# Altium PCB SmartHome.PcbDoc
Units mm, origin at the board's own origin, x right, y up, seen from the top; angles counter-clockwise.
Board outline 69.34 x 60.83 mm, 2 copper layers (Top Layer, Bottom Layer); 77 components, 68 nets, 304 pads, 21 vias.
Unrouted connection lines stored in the file: 49.
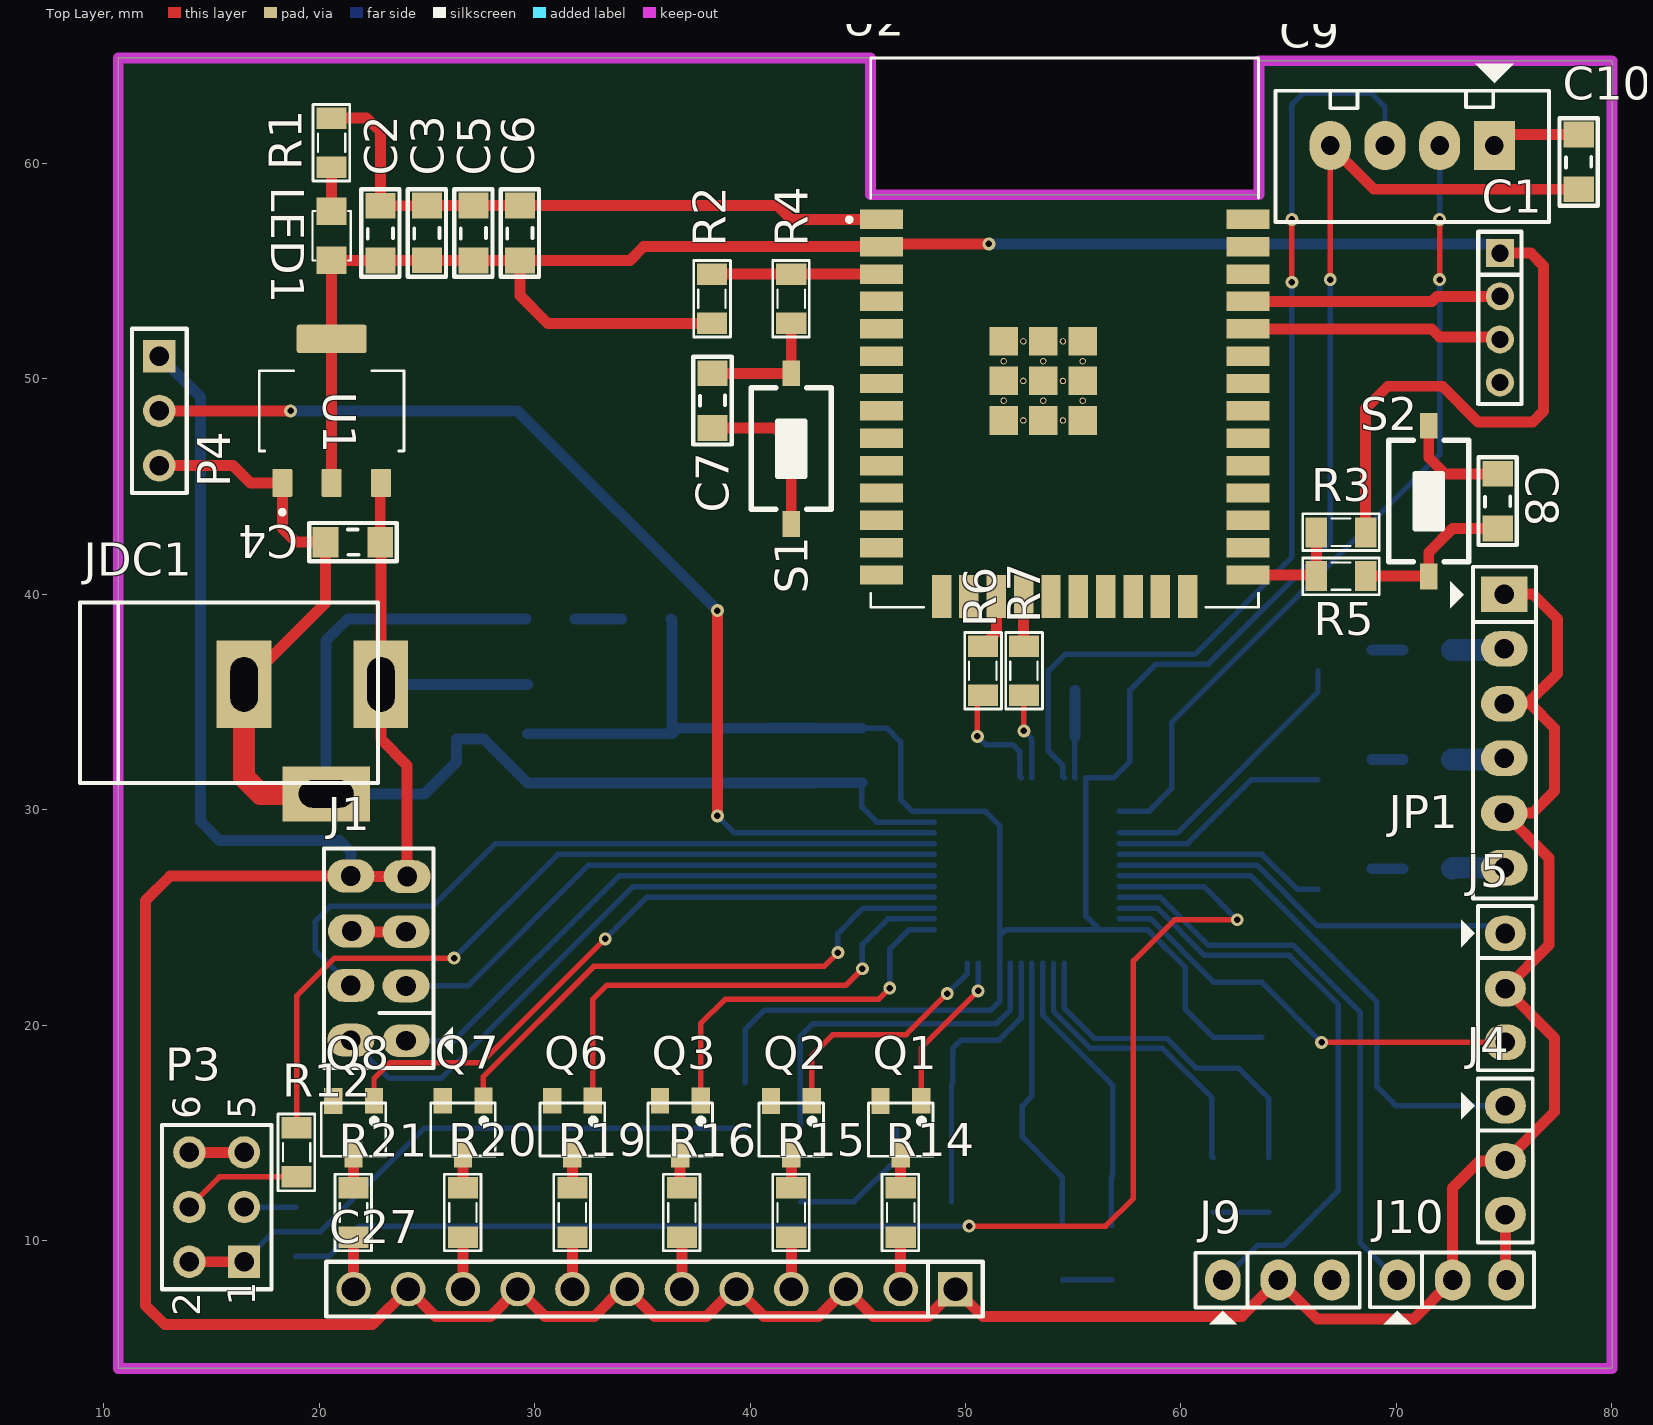
[diagram p0: Top Layer view]
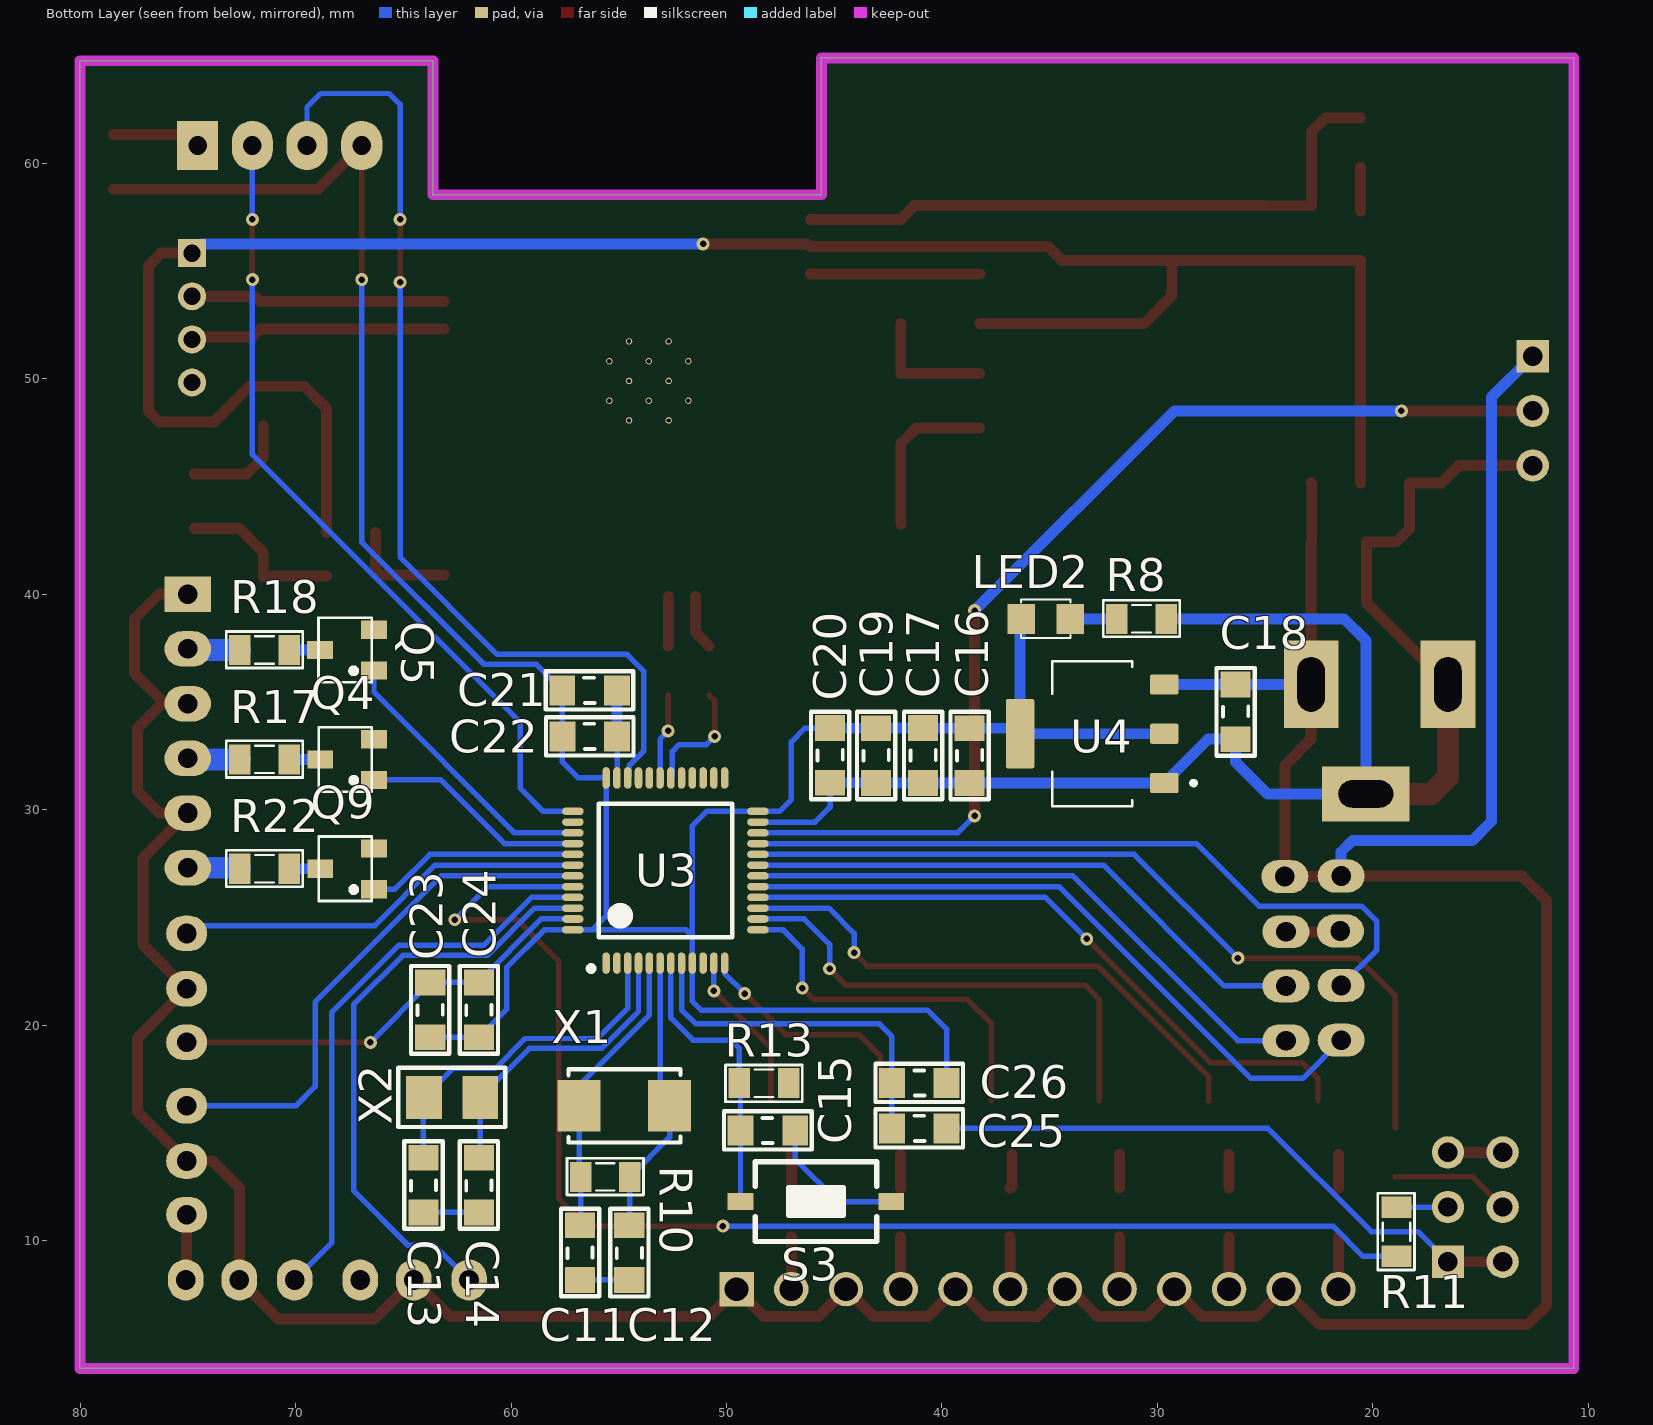
[diagram p1: Bottom Layer view, seen from below]
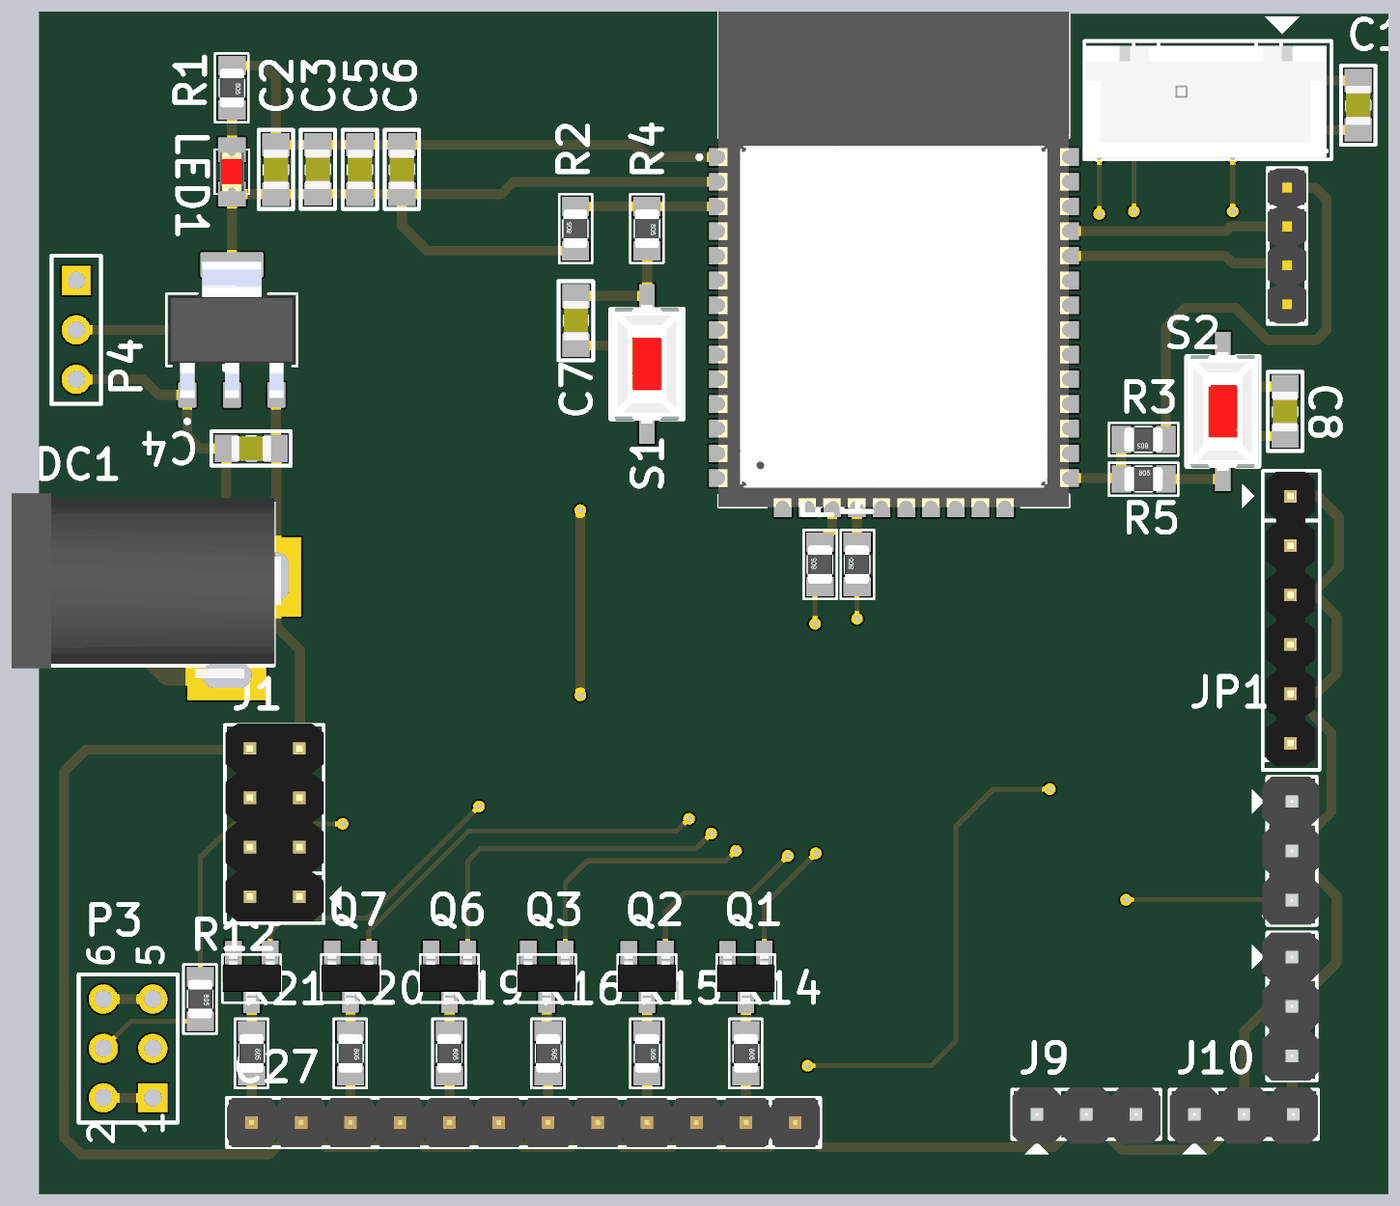
[diagram p2: 3D render of the assembled board from above, using the file's embedded part models]
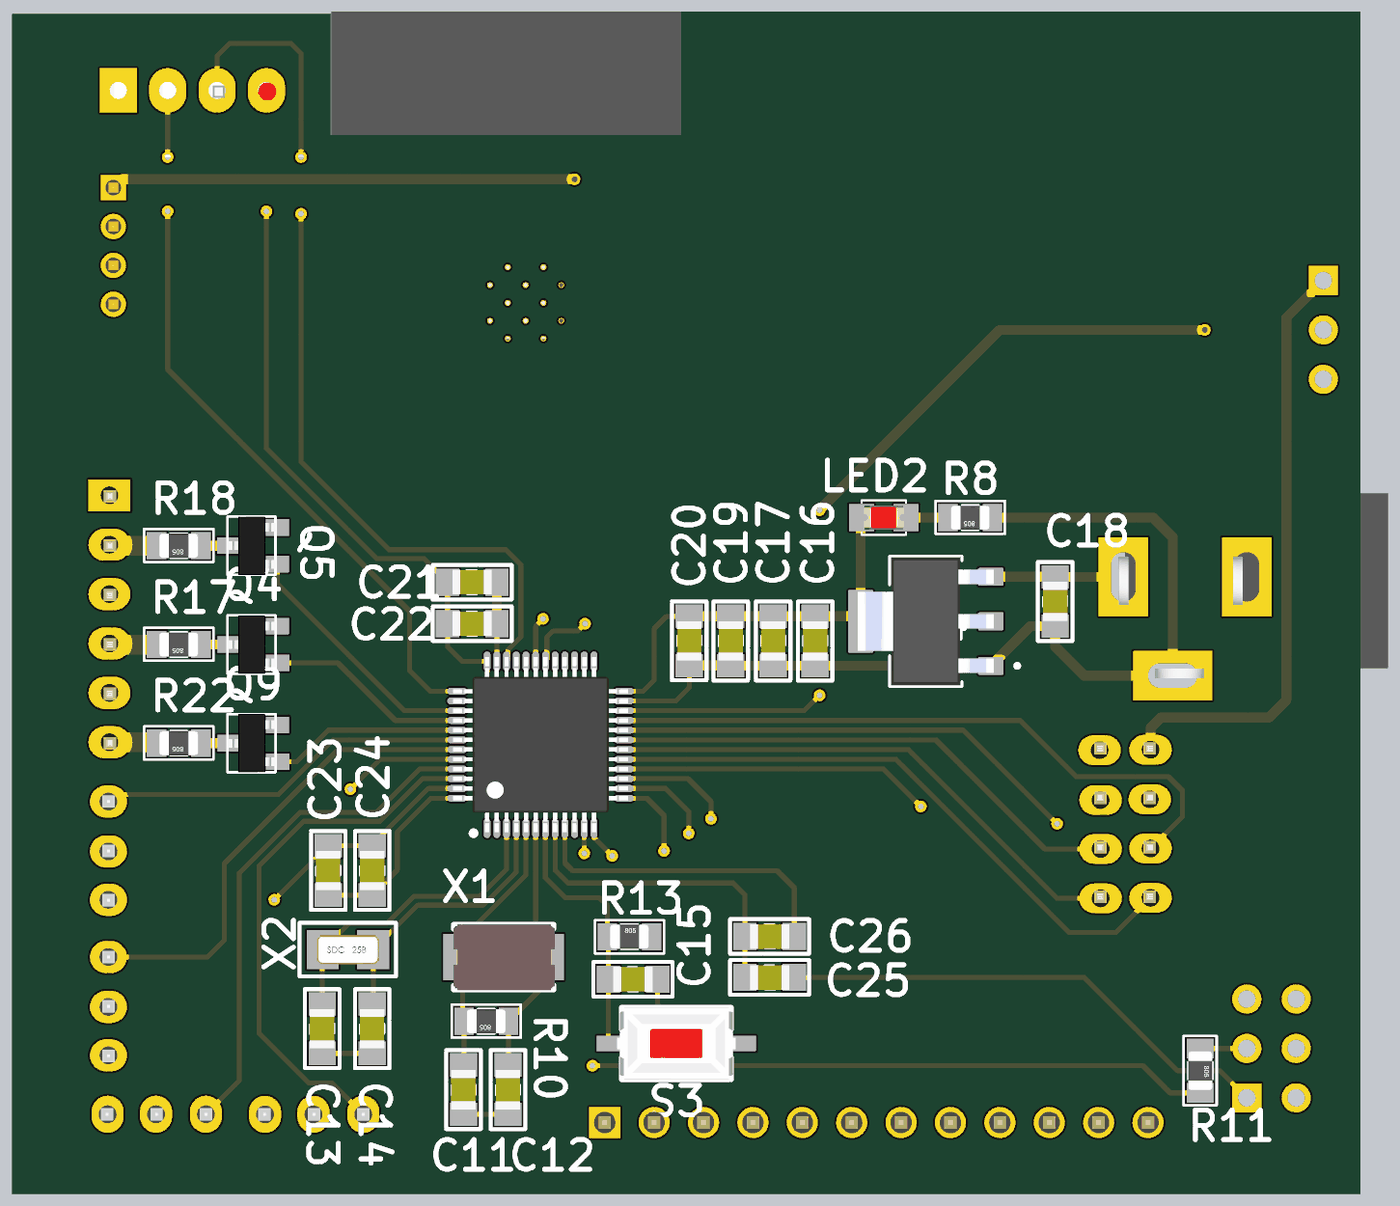
[diagram p3: 3D render of the assembled board from below, using the file's embedded part models]

## Layer stack, top to bottom
Top Solder: solder mask 0.0102, Solder Resist, Dk 3.5
Top Layer: signal copper 0.0356
Dielectric 1: dielectric 0.32, FR-4, Dk 4.8
Bottom Layer: signal copper 0.0356
Bottom Solder: solder mask 0.0102, Solder Resist, Dk 3.5

## Board outline
10.668,4.064 10.668,64.897 45.593,64.897 45.593,58.547 63.627,58.547 63.627,64.77 80.01,64.77 80.01,4.064

## Design rules (kind name [scope] priority, off if disabled: settings)
Clearance Clearance_2 [InComponent('J1')] p1: gap=0.127 ignorepadtopadclearanceinfootprint=FALSE
Clearance [InComponent('U3')] p2: gap=0.127 ignorepadtopadclearanceinfootprint=FALSE
Clearance Clearance_1 [All] p3: gap=0.203 ignorepadtopadclearanceinfootprint=FALSE
PolygonConnect [InNet('GND')] p1: connectstyle=Direct reliefconductorwidth=0.254 reliefentries=4 polygonreliefangle="90 Angle" airgapwidth=0.254
RoutingVias [All] p1: holewidth=0.3 width=0.6 viastyle="Through Hole" minholewidth=0.3 minwidth=0.6 maxholewidth=1 maxwidth=2
SolderMaskExpansion [All] p1: expansion=0.102
Width [All] p1: maxlimit=1.016 minlimit=0.254 preferedwidth=0.508
30 further rules are at their usual default settings.

## Classes and differential pairs
component class STM32: C9 C10 C11 C12 C13 C14 C15 C16 C17 C18 C19 C20 C21 C22 C23 C24 C25 C26 J1 J4 J5 J9 J10 LED2 P3 P4 R8 R10 R11 R12 R13 S3 U3 U4 X1 X2
component class LED_CONTROL: C27 JP1 Q1 Q2 Q3 Q4 Q5 Q6 Q7 Q8 Q9 R14 R15 R16 R17 R18 R19 R20 R21 R22
component class ESP32: C1 C2 C3 C4 C5 C6 C7 C8 JDC1 LED1 R1 R2 R3 R4 R5 R6 R7 S1 S2 U1 U2

## Components (designator, comment, footprint, x,y, rotation, side; value= is the part's Value field where it differs from the comment)
C1 "JP4x1-2.0" J4-D1T 74.803,52.832 r270 top
C2 "104" CAP_0805 22.86,56.765 r270 top value=33p
C3 "106" CAP_0805 25.019,56.774 r270 top value=33p
C4 "104" CAP_0805 21.561,42.443 r0 top value=33p
C5 "104" CAP_0805 27.178,56.77 r270 top value=33p
C6 "100nF" CAP_0805 29.337,56.77 r270 top value=33p
C7 "104" CAP_0805 38.227,48.988 r90 top value=33p
C8 "104" CAP_0805 74.728,44.323 r270 top value=33p
C9 "Header4" Header4 74.549,60.833 r180 top
C10 "104" CAP_0805 78.486,60.071 r270 top value=33p
C11 "20p" CAP_0805 56.769,9.443 r270 bottom value=33p
C12 "20p" CAP_0805 54.483,9.439 r270 bottom value=33p
C13 "20p" CAP_0805 64.038,12.576 r270 bottom value=33p
C14 "20p" CAP_0805 61.468,12.576 r270 bottom value=33p
C15 "104" CAP_0805 48.077,15.088 r0 bottom value=33p
C16 "104" CAP_0805 38.735,32.512 r90 bottom value=33p
C17 "106" CAP_0805 40.894,32.516 r90 bottom value=33p
C18 "104" CAP_0805 26.391,34.544 r90 bottom value=33p
C19 "106" CAP_0805 43.078,32.512 r90 bottom value=33p
C20 "104" CAP_0805 45.212,32.521 r90 bottom value=33p
C21 "106" CAP_0805 56.351,35.513 r0 bottom value=33p
C22 "104" CAP_0805 56.347,33.379 r0 bottom value=33p
C23 "106" CAP_0805 63.725,20.711 r270 bottom value=33p
C24 "104" CAP_0805 61.465,20.711 r270 bottom value=33p
C25 "106" CAP_0805 41.051,15.235 r180 bottom value=33p
C26 "104" CAP_0805 41.051,17.344 r180 bottom value=33p
C27 "JP12" JP12-D1T 49.53,7.747 r180 top
J1 "Connector 4x2" JP4x2 22.771,23.101 r90 top
J4 "Jumper 3" JP3 75.057,13.719 r270 top value=J3
J5 "Jumper 3" JP3 75.057,21.717 r270 top value=J3
J9 "Jumper 3" JP3 64.488,8.169 r0 top value=J3
J10 "Jumper 3" JP3 72.583,8.173 r0 top value=J3
JDC1 "Jac DC" DC-IN 19.685,33.274 r0 top
JP1 "JP6 PIN" JP6 75.003,40.005 r270 top value=JP7
LED1 "LED" LED-0805-Red 20.574,55.499 r90 top value="LED 3 ly Single Colour"
LED2 "LED" LED-0805-Red 36.322,38.862 r180 bottom value="LED 3 ly Single Colour"
P3 "Header 3X2" HDR2X3 16.51,9.017 r90 top
P4 "Header 3" HDR1X3 12.573,51.054 r270 top
Q1 "2N222" SOT23D 46.99,15.24 r180 top value=C1815
Q2 "2N222" SOT23D 41.91,15.24 r180 top value=C1815
Q3 "2N222" SOT23D 36.754,15.245 r180 top value=C1815
Q4 "2N222" SOT23D 67.605,32.333 r90 bottom value=C1815
Q5 "2N222" SOT23D 67.61,37.413 r90 bottom value=C1815
Q6 "2N222" SOT23D 31.75,15.245 r180 top value=C1815
Q7 "2N222" SOT23D 26.67,15.245 r180 top value=C1815
Q8 "2N222" SOT23D 21.59,15.24 r180 top value=C1815
Q9 "2N222" SOT23D 67.605,27.259 r90 bottom value=C1815
R1 "1k" RES-SMD-0805 20.574,60.96 r270 top
R2 "12k" RES-SMD-0805 38.227,53.721 r90 top
R3 "12k" RES-SMD-0805 67.428,42.876 r180 top
R4 "470" RES-SMD-0805 41.91,53.721 r270 top
R5 "470" RES-SMD-0805 67.428,40.844 r0 top
R6 "0" RES-SMD-0805 50.8,36.449 r90 top
R7 "0" RES-SMD-0805 52.705,36.449 r90 top
R8 "510" RES-SMD-0805 30.734,38.862 r0 bottom
R10 "1M" RES-SMD-0805 55.626,12.954 r0 bottom
R11 "100k" RES-SMD-0805 18.898,10.414 r270 bottom
R12 "100k" RES-SMD-0805 18.948,14.097 r270 top
R13 "10k" RES-SMD-0805 48.26,17.307 r180 bottom
R14 "220" RES-SMD-0805 46.99,11.303 r270 top
R15 "220" RES-SMD-0805 41.91,11.303 r270 top
R16 "220" RES-SMD-0805 36.83,11.303 r270 top
R17 "220" RES-SMD-0805 71.44,32.333 r0 bottom
R18 "220" RES-SMD-0805 71.44,37.413 r0 bottom
R19 "220" RES-SMD-0805 31.75,11.303 r270 top
R20 "220" RES-SMD-0805 26.67,11.303 r270 top
R21 "220" RES-SMD-0805 21.59,11.303 r270 top
R22 "220" RES-SMD-0805 71.44,27.259 r0 bottom
S1 "SW-SMD" SW-SMD 41.91,46.758 r90 top
S2 "SW-SMD" SW-SMD 71.501,44.323 r270 top
S3 "SW-SMD" SW-SMD 45.847,11.811 r0 bottom
U1 "AMS1117" SOT229P700X180-4N 20.574,48.514 r90 top
U2 "ESP32-WROOM-32" MODULE_ESP32-WROOM-32 54.601,52.144 r0 top
U3 "STM32" "LQFP 48" 52.832,27.178 r90 bottom
U4 "AMS1117" SOT229P700X180-4N 33.02,33.526 r0 bottom
X1 "8MHz" "CRYSTAL_ABM3 5x3.2mm" 54.737,16.256 r180 bottom
X2 "32.768KHz" Crystal_ABS07_SMD-3.2x1.5MM 62.738,16.637 r180 bottom

## Footprints (in the part's own frame and the unit in brackets; to place one, negate y for a bottom-side part, rotate by r counter-clockwise, add the part's x,y. Pads: shape width x height; smd on the part's side, far side on the other; paste and mask are expansions set on the pad)
CAP_0805 [mm]
  rect 1.2x1.4 smd: 1(-1.27,-0.025) 2(1.27,-0.025)
  silkscreen extent -2.03,-0.91 2.03,0.86, body extent -1.01,-0.66 1.01,0.61, height 0.61
"CRYSTAL_ABM3 5x3.2mm" [mm] "Crystal 5x3.2mm"
  rect 2x2.4 smd: 1(-2.1,0) 2(2.1,0)
  silkscreen extent -2.59,-1.7 2.61,1.7, body extent -2.57,-1.7 2.63,1.7, height 1.3
Crystal_ABS07_SMD-3.2x1.5MM [mm] "Crystal 3.2x1.5mm"
  rect 1.65x2 smd: 1(-1.3,0) 2(1.3,0)
  silkscreen extent -2.49,-1.37 2.46,1.38, body extent -1.6,-0.75 1.6,0.75, height 0.81
DC-IN [mil] "Jac DC input"
  rect 100x160 hole 50 slot 100 at 90 deg: 1(125,100) 2(-125,100)
  rect 160x100 hole 50 slot 100 at 0 deg: 3(25,-100)
  silkscreen extent -425,-80 120,250, body extent -410,-105 134,269, height 434
HDR1X3 [mm] "Connector; Header; 3 Position"
  rect 1.5x1.5 hole 0.9: 1(0,0)
  round 1.5 hole 0.9: 2(2.54,0) 3(5.08,0)
  silkscreen extent -1.27,-1.27 6.35,1.27, body extent -1.27,-1.27 6.35,1.27, height 7
HDR2X3 [mm] "Connector; Header; 3x2 Position"
  rect 1.5x1.5 hole 0.9: 1(0,0)
  round 1.5 hole 0.9: 2(0,2.54) 3(2.54,0) 4(2.54,2.54) 5(5.08,0) 6(5.08,2.54)
  silkscreen extent -1.27,-1.27 6.35,3.81, body extent -1.27,-1.27 6.35,3.81, height 7
Header4 [mil] "CON4"
  rect 75x90 hole 34: 1(0,0)
  oval 75x90 hole 34: 2(100,0) 3(200,0) 4(300,0)
  silkscreen extent -100,-150 400,140, body extent -90,-90 398,136, height 276
J4-D1T [mm] "4 pins, 1 row, straight, gold plating"
  rect 1.3x1.3 hole 0.8: 1(-3,0)
  round 1.3 hole 0.8: 2(-1,0) 3(1,0) 4(3,0)
  silkscreen extent -4,-1 4,1, body extent -4,-1 4,1, height 6.01
JP3 [mil] "Jumper 3"
  oval 65x75 hole 36: 1(-100,0) 2(1,0) 3(99,0)
  silkscreen extent -150,-81 150,50, body extent -150,-60 150,55, height 355
JP4x2 [mil] "Connector 4x2"
  oval 60x86 hole 36: 1(-150.5,-49.5) 2(-50.5,-49.5) 3(48.5,-49.5) 4(149.5,-51.5) 5(-149.5,51.5) 6(-49.5,51.5) 7(50,50) 8(150.5,51.5)
  silkscreen extent -200,-135 200,101, body extent -197,-100 203,100, height 335
JP6 [mil] "JP6"
  rect 65x85 hole 36: 1(0,0)
  oval 65x85 hole 36: 2(100,0) 3(200,0) 4(300,0) 5(400,0) 6(500,0)
  silkscreen extent -50,-99 556,58, body extent -48,-50 548,48, height 323
JP12-D1T [mm] "12 pins, 1 row, straight, gold plating"
  rect 1.6x1.6 hole 1.1: 1(0,0)
  round 1.6 hole 1.1: 2(2.54,0) 3(5.08,0) 4(7.62,0) 5(10.16,0) 6(12.7,0) 7(15.24,0) 8(17.78,0) 9(20.32,0) 10(22.86,0) 11(25.4,0) 12(27.94,0)
  silkscreen extent -1.27,-1.27 29.21,1.27, body extent -1.27,-1.27 29.21,1.27, height 8.54
LED-0805-Red [mil]
  rect 50x55 smd: 1(0,0) 2(90,0)
  silkscreen extent 0,-35 90,35, body extent 5,-25 85,25, height 43
"LQFP 48" [mm] "LQFP, 48-Leads, Body 7,00x7,00mm, Pitch 0,50mm, IPC Medium Density"
  oval 1x0.35 smd: 1(-4.296,2.75) 2(-4.296,2.25) 3(-4.296,1.75) 4(-4.296,1.25) 5(-4.296,0.75) 6(-4.296,0.25) 7(-4.296,-0.25) 8(-4.296,-0.75) 9(-4.296,-1.25) 10(-4.296,-1.75) 11(-4.296,-2.25) 12(-4.296,-2.75) 25(4.296,-2.75) 26(4.296,-2.25) 27(4.296,-1.75) 28(4.296,-1.25) 29(4.296,-0.75) 30(4.296,-0.25) 31(4.296,0.25) 32(4.296,0.75) 33(4.296,1.25) 34(4.296,1.75) 35(4.296,2.25) 36(4.296,2.75)
  oval 0.35x1 smd: 13(-2.75,-4.296) 14(-2.25,-4.296) 15(-1.75,-4.296) 16(-1.25,-4.296) 17(-0.75,-4.296) 18(-0.25,-4.296) 19(0.25,-4.296) 20(0.75,-4.296) 21(1.25,-4.296) 22(1.75,-4.296) 23(2.25,-4.296) 24(2.75,-4.296) 37(2.75,4.296) 38(2.25,4.296) 39(1.75,4.296) 40(1.25,4.296) 41(0.75,4.296) 42(0.25,4.296) 43(-0.25,4.296) 44(-0.75,4.296) 45(-1.25,4.296) 46(-1.75,4.296) 47(-2.25,4.296) 48(-2.75,4.296)
  silkscreen extent -4.67,-3.1 3.1,3.58, body extent -4.5,-4.5 4.5,4.5, height 1.6
MODULE_ESP32-WROOM-32 [mm]
  rect 2x0.9 smd: 1(-8.5,5.26) 2(-8.5,3.99) 3(-8.5,2.72) 4(-8.5,1.45) 5(-8.5,0.18) 6(-8.5,-1.09) 7(-8.5,-2.36) 8(-8.5,-3.63) 9(-8.5,-4.9) 10(-8.5,-6.17) 11(-8.5,-7.44) 12(-8.5,-8.71) 13(-8.5,-9.98) 14(-8.5,-11.25) 25(8.5,-11.25) 26(8.5,-9.98) 27(8.5,-8.71) 28(8.5,-7.44) 29(8.5,-6.17) 30(8.5,-4.9) 31(8.5,-3.63) 32(8.5,-2.36) 33(8.5,-1.09) 34(8.5,0.18) 35(8.5,1.45) 36(8.5,2.72) 37(8.5,3.99) 38(8.5,5.26)
  rect 0.9x2 smd: 15(-5.715,-12.25) 16(-4.445,-12.25) 17(-3.175,-12.25) 18(-1.905,-12.25) 19(-0.635,-12.25) 20(0.635,-12.25) 21(1.905,-12.25) 22(3.175,-12.25) 23(4.445,-12.25) 24(5.715,-12.25)
  rect 1.33x1.33 smd: 39_1(-2.835,-0.405) 39_2(-1,-0.405) 39_3(0.835,-0.405) 39_4(-2.835,-2.24) 39_5(-1,-2.24) 39_6(0.835,-2.24) 39_7(-2.835,-4.075) 39_8(-1,-4.075) 39_9(0.835,-4.075)
  round 0.3 hole 0.2: 39_10(-1.917,-0.405) 39_11(-0.082,-0.405) 39_12(-2.835,-1.322) 39_13(-1,-1.322) 39_14(0.835,-1.322) 39_15(-1.917,-2.24) 39_16(-0.082,-2.24) 39_17(-2.835,-3.157) 39_18(-1,-3.157) 39_19(0.835,-3.157) 39_20(-1.917,-4.075) 39_21(-0.082,-4.075)
  silkscreen extent -10.1,-12.75 9,12.75, body extent -10.54,-12.75 8.98,12.75, height 3.2
RES-SMD-0805 [mil]
  rect 39.37x55 smd: 1(-45,0) 2(45,0)
  silkscreen extent -70,-34 70,33, body extent -39,-25 39,25, height 31
SOT23D [mm] "SOT 23C - 1-3-2 - BCE"
  rect 0.85x1.2 smd: 1(-0.95,-1.25) 2(0.94,-1.245) 3(0,1.25)
  silkscreen extent -1.5,-1.14 1.5,1.32, body extent -1.5,-1.17 1.5,1.33, height 1.06
SOT229P700X180-4N [mm]
  rrect15% 1.31x0.93 smd: 1(-3.345,2.29) 2(-3.345,0) 3(-3.345,-2.29)
  rrect15% 1.31x3.24 smd: 4(3.345,0)
  silkscreen extent -4.8,-3.36 1.86,3.36, body extent -3.5,-3.25 3.5,3.25, height 1.8
SW-SMD [mm] "Switch SMD type"
  rect 1.2x0.8 smd: 1(-3.5,0) 2(3.5,0)
  silkscreen extent -2.82,-1.85 2.82,1.85, body extent -3.05,-1.85 3.05,1.85, height 2.5

## Part data
C1: "WR-PHD 2.00 mm Socket Header", Manufacturer="Würth Elektronik eiSos GmbH", partNo=62000411821, ComponentLink1 Description=Manufacturer, ComponentLink1URL=http://www.we-online.com, ComponentLink2 Description=Datasheet, ComponentLink2URL=http://katalog.we-online.de/em/datasheet/6200xx11821.pdf, Created by="Karrer Zheng", Created Date="2 April 2013", NoPins=04
C2 C3 C4 C5 C6 C7 C8 C10 C11 C12 C13 C14 C15 C16 C17 C18 C19 C20 C21 C22 C23 C24 C25 C26: library part CapSMD, "Capacitor", LatestRevisionDate=17-Jul-2002, LatestRevisionNote="Re-released for DXP Platform.", PackageReference=RAD-0.3, Published=8-Jun-2000, Publisher="Altium Limited"
C9: "Header IDC, 4 x 1 Pin Vertical 2.54mm Pitch (Non-Boxed, Male)", Manufacturer="Würth Elektronik eiSos GmbH", partNo=613002143121, ComponentLink1 Description=Manufacturer, ComponentLink1URL=http://www.we-online.com, ComponentLink2 Description=Datasheet, ComponentLink2URL=http://katalog.we-online.de/em/datasheet/6130xx143121.pdf, Created by="Karrer Zheng", Created Date="29 March 2013", NoPins=02
C27: "WR-PHD 2.54 mm Angled Socket Header", Manufacturer="Würth Elektronik eiSos GmbH", partNo=613012143121, ComponentLink1 Description=Manufacturer, ComponentLink1URL=http://www.we-online.com, ComponentLink2 Description=Datasheet, ComponentLink2URL=http://katalog.we-online.de/em/datasheet/6130xx143121.pdf, Created by="Karrer Zheng", Created Date="29 March 2013", NoPins=12
J1: library part JP4x2
J4 J5 J9 J10: library part JP3
JDC1: library part DCIN, "Jac DC input"
JP1: library part JP6
LED1 LED2: "LED Single colour Green and Red"
P3: "Header, 3-Pin, Dual row", LatestRevisionDate=17-Jul-2002, LatestRevisionNote="Re-released for DXP Platform.", Publisher="Altium Limited"
P4: "Header, 3-Pin", LatestRevisionDate=17-Jul-2002, LatestRevisionNote="Re-released for DXP Platform.", Publisher="Altium Limited"
Q1 Q2 Q3 Q4 Q5 Q6 Q7 Q8 Q9: "NPN 600mW, ECB", =C2383
R1 R2 R3 R4 R5 R6 R7 R8 R10 R11 R12 R13 R14 R15 R16 R17 R18 R19 R20 R21 R22: library part "Resistor - SMD", "Resistor", Manufacturer="Generic Components", Class=Passive, Published=08/06/2000, Publisher="Altium Hobart Technology Centre"
S1 S2 S3: "Switch", LatestRevisionDate=17-Jul-2002, LatestRevisionNote="Re-released for DXP Platform.", PackageReference=SPST-2, Published=24-Mar-1999, Publisher="Altium Limited"
U1 U4: "1A LOW DROPOUT VOLTAGE REGULATOR SOT-223", Package="SOT-223 Seeed Technology", Availability="Not in stock", Check_prices=https://www.snapeda.com/parts/AMS1117/Advanced+Monolithic+Systems/view-part/?ref=eda, MF="Advanced Monolithic Systems", MP=AMS1117, Price=None, SnapEDA_Link=https://www.snapeda.com/parts/AMS1117/Advanced+Monolithic+Systems/view-part/?ref=snap
U2: "Bluetooth, WiFi Transceiver Module 2.4GHz ~ 2.5GHz Surface Mount", Package="Module Espressif Systems", Digi-Key_Part_Number=1904-1010-1-ND, Digi-Key_Purchase_URL=https://www.digikey.com/product-detail/en/espressif-systems/ESP32-WROOM-32/1904-1010-1-ND/8544305?utm_source=snapeda&utm_medium=aggregator&utm_campaign=symbol, MF="Espressif Systems", MP=ESP32-WROOM-32, SnapEDA_Link=https://www.snapeda.com/parts/ESP32-WROOM-32/Espressif%20Systems/view-part/2753322/?ref=snap
U3: library part STM32F103C8T6, "STM32 ARM-based 32-bit MCU with 64 Kbytes Flash, 64-pin LQFP, Industrial Temperature"
X1: library part ABM3-8.000MHZ-D2Y-T, "CRYSTAL 8.0000MHZ 18pF SMD", Category=CRYSTAL, CompanyID=VT-00517, MPN=ABM3-8.000MHZ-D2Y-T, Solder=SMT
X2: library part ABS07-32.768KHZ-T, "CRYSTAL 32.7680KHZ 12.5pF SMD", Category=CRYSTAL, CompanyID=VT-01153, MPN=ABS07-32.768KHZ-T, Solder=SMT

## Via types
v1: diameter 0.6, hole 0.3, Top Layer to Bottom Layer, 21 vias

## Nets (pads, with @x,y where several pads share a name; then routed paths per layer and width w, separated by ;. In a path a pad name is that pad's centre, name@x,y a point inside that pad or via, vN(x,y) a via of type N, cw(c..) or ccw(c..) an arc to the next point about the centre after c; other vN are vias at no path point)
+3.3VDC: C1.1 C2.2 C3.2 C5.2 C6.2 C9.4 C10.2 C16.2 C17.2 C19.2 C20.2 C21.2 C22.2 C23.2 C24.2 C25.2 C26.2 LED1.1 LED2.1 P3.1 P3.2 R2.1 R3.1 R13.2 U1.2 U1.4 U2.2 U3.9 U3.24 U3.36 U3.48 U4.2 U4.4 | length 254.1
  Top Layer w0.254: v1(66.929,54.61) C9.4
  Top Layer w0.508: P3.2 P3.1 ; U1.2 U1.4 LED1.1 22.831,55.499 C2.2 24.985,55.495 C3.2 27.148,55.504 C5.2 C6.2 ; R2.1 30.607,52.578 29.312,53.873 C6.2 ; v1(51.082,56.261) 46.228,56.261 U2.2 35.052,56.134 34.418,55.5 C6.2 ; C9.4 68.961,58.801 C10.2 ; R3.1 68.571,48.632 69.596,49.657 72.136,49.657 73.787,48.006 76.327,48.006 76.835,48.514 76.835,55.245 76.248,55.832 C1.1
  Bottom Layer w0.254: P3.1 17.907,10.414 20.066,10.414 24.862,15.21 C25.2 ; C26.2 39.781,19.812 40.67,20.701 51.181,20.701 51.582,21.102 U3.9 51.582,24.13 ; C20.2@45.178,33.782 46.355,33.782 46.99,33.147 46.99,30.48 47.542,29.928 U3.24 50.92,29.928 51.582,29.266 51.582,24.13 ; C23.2 C24.2 60.198,20.733 60.198,22.682 58.452,24.428 U3.48 56.217,24.428 ; v1(66.929,54.61) 66.929,42.418 61.265,36.754 58.837,36.754 C21.2 57.621,33.409 C22.2 57.617,32.217 56.874,31.474 U3.36 55.582,25.063 56.217,24.428 ; 51.582,24.13 51.88,24.428 56.217,24.428
  Bottom Layer w0.508: U4.2 U4.4 ; LED2.1 36.365,38.819 U4.4 ; C20.2@45.178,33.782 C19.2 43.049,33.786 C17.2 40.864,33.782 C16.2 36.621,33.782 U4.4 ; v1(51.082,56.261) 74.374,56.261 C1.1
+5VDC: C4.2 C18.2 C27.1 C27.3 C27.5 C27.7 C27.9 C27.11 J1.4 J1.8 J4.2 J5.2 J9.2 J10.2 JDC1.1 JP1.1 JP1.3 JP1.5 P4.1 U1.3 U4.3 | length 200.8
  Top Layer w0.508: U1.3 22.831,45.136 C4.2 22.86,42.389 JDC1.1 22.86,33.274 24.079,32.055 J1.4 21.488,26.899 J1.8 13.081,26.924 11.938,25.781 11.938,6.985 12.827,6.096 22.479,6.096 C27.11 25.4,6.477 27.94,6.477 C27.9 30.48,6.477 32.766,6.477 34.036,7.747 C27.7 35.56,6.477 37.973,6.477 39.243,7.747 C27.5 40.64,6.477 43.18,6.477 C27.3 45.72,6.477 48.26,6.477 C27.1 50.8,6.477 62.822,6.477 J9.2 66.332,6.35 70.785,6.35 J10.2 72.608,12.446 73.856,13.693 J4.2 77.343,15.979 77.343,19.406 J5.2 77.089,23.724 77.089,27.759 JP1.5 76.327,29.845 77.343,30.861 77.343,33.782 76.2,34.925 ; JP1.3 76.2,34.925 ; JP1.1 76.327,40.005 77.47,38.862 77.47,36.322 76.136,34.989 76.2,34.925
  Bottom Layer w0.508: P4.1 14.478,49.149 14.478,29.464 15.367,28.575 20.935,28.575 21.463,28.047 J1.8 ; JDC1.1 C18.2 26.367,35.816 U4.3
BOOT0: R11.2 U3.44 | length 62.8
  Top Layer w0.254: v1(50.165,10.668) 56.506,10.668 57.785,11.947 57.785,22.987 59.69,24.892 v1(62.611,24.892)
  Bottom Layer w0.254: R11.2 20.447,9.271 21.844,10.668 v1(50.165,10.668) ; U3.44 61.075,26.428 v1(62.611,24.892)
BOOT1: R12.1 U3.20 | length 38.4
  Top Layer w0.254: R12.1 18.948,21.361 20.701,23.114 v1(26.264,23.114)
  Bottom Layer w0.254: v1(26.264,23.114) 31.078,27.928 U3.20
EN: R2.2 R4.1 U2.3 | length 7.9
  Top Layer w0.508: R2.2 R4.1 U2.3
FAN_CTRL: Q9.1 U3.41 | length 9.9
  Bottom Layer w0.254: U3.41 63.766,27.928 65.385,26.309 Q9.1
FAN_CTRL_OUT: JP1.6 R22.2 | length 2.4
  Bottom Layer w1.016: R22.2 72.629,27.305 JP1.6
GAS_AI: J1.1 U3.18 | length 27.7
  Bottom Layer w0.254: J1.1 26.264,19.279 33.913,26.928 U3.18
GAS_DI: J1.2 U3.19 | length 26.8
  Bottom Layer w0.254: J1.2 26.899,21.819 32.508,27.428 U3.19
GND: C1.4 C2.1 C3.1 C4.1 C5.1 C6.1 C7.1 C8.1 C9.1 C10.1 C15.1 C16.1 C17.1 C18.1 C19.1 C20.1 C21.1 C22.1 C23.1 C24.1 C25.1 C26.1 J1.3 J1.7 J4.3 J5.3 J9.3 J10.3 JDC1.2 JDC1.3 P3.5 P3.6 P4.3 Q1.2 Q2.2 Q3.2 Q4.2 Q5.2 Q6.2 Q7.2 Q8.2 Q9.2 R1.1 R8.1 S1.1 S2.1 S3.1 U1.1 U2.1 U2.15 U2.38 U2.39_1 U2.39_2 U2.39_3 U2.39_4 U2.39_5 U2.39_6 U2.39_7 U2.39_8 U2.39_9 U2.39_10 U2.39_11 U2.39_12 U2.39_13 U2.39_14 U2.39_15 U2.39_16 U2.39_17 U2.39_18 U2.39_19 U2.39_20 U2.39_21 U3.8 U3.23 U3.29 U3.35 U3.47 U4.1 | length 178.1
  Top Layer w0.254: v1(66.53,19.202) J5.3
  Top Layer w0.508: P4.3 16.002,45.974 16.807,45.169 U1.1 18.284,43.057 18.923,42.418 C4.1 20.291,39.595 JDC1.2 ; P3.6 P3.5 ; R1.1 22.2,62.103 22.835,61.468 C2.1 24.985,58.035 C3.1 27.148,58.044 C5.1 C6.1 41.274,58.04 41.91,57.404 U2.1 ; J1.7 21.539,24.333 J1.3 ; C7.1 41.182,47.718 41.91,46.99 S1.1 ; S2.1 71.501,46.355 72.263,45.593 C8.1 ; C9.1 75.057,61.341 C10.1 ; J4.3 75.057,8.214 J10.3
  Top Layer w1.016: JDC1.2 16.51,31.496 17.272,30.734 JDC1.3
  Bottom Layer w0.254: C25.1 C26.1 42.321,19.471 42.916,20.066 51.435,20.066 52.082,20.713 U3.8 ; S3.1 44.831,11.811 46.807,13.787 C15.1 ; C20.1 45.187,30.124 45.883,29.428 U3.23 ; C22.1 55.077,31.479 U3.35 ; U3.47 58.599,24.928 61.49,22.037 C24.1 C23.1 v1(66.53,19.202)
  Bottom Layer w0.508: R8.1 21.336,38.862 20.32,37.846 JDC1.3 24.878,30.734 26.365,32.221 C18.1 27.637,33.274 U4.1 29.681,31.242 C16.1 38.714,31.246 C17.1 40.873,31.242 C19.1 43.062,31.251 C20.1 ; C22.1 55.081,33.409 C21.1
HORN: Q5.1 U3.39 | length 12.9
  Bottom Layer w0.254: U3.39 59.833,28.928 66.36,35.455 Q5.1
HORN_OUT: JP1.2 R18.2 | length 2.4
  Bottom Layer w1.016: R18.2 74.951,37.413 JP1.2
IO0: R3.2 R5.1 U2.25 | length 5.1
  Top Layer w0.508: U2.25 66.235,40.894 66.285,40.944 R3.2
LED1: Q1.1 U3.11 | length 7.5
  Top Layer w0.254: Q1.1 47.94,18.948 v1(50.582,21.59)
  Bottom Layer w0.254: v1(50.582,21.59) U3.11
LED1_OUT: C27.2 R14.2 | length 2.4
  Top Layer w0.508: C27.2 R14.2
LED2: Q2.1 U3.12 | length 11.4
  Top Layer w0.254: Q2.1 42.86,18.578 43.84,19.558 47.244,19.558 v1(49.149,21.463)
  Bottom Layer w0.254: v1(49.149,21.463) 50.082,22.396 U3.12
LED2_OUT: C27.4 R15.2 | length 2.4
  Top Layer w0.508: C27.4 R15.2
LED3: Q3.1 U3.13 | length 17.3
  Top Layer w0.254: Q3.1 37.704,20.066 38.847,21.209 45.974,21.209 v1(46.482,21.717)
  Bottom Layer w0.254: v1(46.482,21.717) 46.482,23.539 47.371,24.428 U3.13
LED3_OUT: C27.6 R16.2 | length 2.4
  Top Layer w0.508: C27.6 R16.2
LED4: Q6.1 U3.14 | length 22.8
  Top Layer w0.254: Q6.1 32.7,21.209 33.335,21.844 44.438,21.844 v1(45.212,22.618)
  Bottom Layer w0.254: v1(45.212,22.618) 45.212,23.749 46.391,24.928 U3.14
LED4_OUT: C27.8 R19.2 | length 2.4
  Top Layer w0.508: C27.8 R19.2
LED5: Q7.1 U3.15 | length 25.8
  Top Layer w0.254: Q7.1 27.62,17.612 32.741,22.733 43.434,22.733 v1(44.069,23.368)
  Bottom Layer w0.254: v1(44.069,23.368) 44.069,24.257 45.24,25.428 U3.15
LED5_OUT: C27.10 R20.2 | length 2.4
  Top Layer w0.508: C27.10 R20.2
LED6: Q8.1 U3.16 | length 30.5
  Top Layer w0.254: Q8.1 22.54,17.525 23.277,18.263 27.534,18.263 v1(33.274,24.003)
  Bottom Layer w0.254: v1(33.274,24.003) 35.199,25.928 U3.16
LED6_OUT: C27.12 R21.2 | length 2.4
  Top Layer w0.508: C27.12 R21.2
LED_RED_OUT: JP1.4 R17.2 | length 2.4
  Bottom Layer w1.016: R17.2 74.951,32.333 JP1.4
LEDRED: Q4.1 U3.40 | length 10.5
  Bottom Layer w0.254: U3.40 60.305,28.428 63.26,31.383 Q4.1
MOTOR1: J5.1 U3.42 | length 19.2
  Bottom Layer w0.254: U3.42 63.524,27.428 66.339,24.613 74.701,24.613 J5.1
MOTOR2: J4.1 U3.43 | length 24.7
  Bottom Layer w0.254: U3.43 63.242,26.928 69.088,21.082 69.088,17.145 69.974,16.259 J4.1
MOTOR3: J10.1 U3.45 | length 26.5
  Bottom Layer w0.254: U3.45 59.047,25.928 61.276,23.698 65.213,23.698 68.326,20.586 68.326,9.89 J10.1
MOTOR4: J9.1 U3.46 | length 27.8
  Bottom Layer w0.254: U3.46 58.9,25.428 61.087,23.241 65.024,23.241 67.31,20.955 67.31,12.319 64.77,9.779 63.558,9.779 J9.1
NetC7_2: C7.2 R4.2 S1.2 | length 6
  Top Layer w0.508: C7.2 S1.2 R4.2
NetC8_2: C8.2 R5.2 S2.2 | length 7.7
  Top Layer w0.508: R5.2 71.48,40.844 S2.2 71.501,41.945 72.608,43.053 C8.2
NetC11_2: C11.2 C12.2 | length 2.3
  Bottom Layer w0.254: C12.2 54.513,8.173 C11.2
NetC13_2: C13.2 C14.2 | length 2.6
  Bottom Layer w0.254: C14.2 C13.2
NetLED1_2: LED1.2 R1.2 | length 2
  Top Layer w0.508: LED1.2 R1.2
NetLED2_2: LED2.2 R8.2 | length 2.2
  Bottom Layer w0.508: R8.2 LED2.2
NetP3_3: P3.3 R11.1 | length 2.4
  Bottom Layer w0.254: P3.3 R11.1
NetP3_4: P3.4 R12.2 | length 5.6
  Top Layer w0.254: P3.4 15.367,12.954 R12.2
NetQ1_3: Q1.3 R14.1 | length 1.5
  Top Layer w0.508: R14.1 Q1.3
NetQ2_3: Q2.3 R15.1 | length 1.5
  Top Layer w0.508: R15.1 Q2.3
NetQ3_3: Q3.3 R16.1 | length 1.6
  Top Layer w0.508: Q3.3 36.754,12.522 R16.1
NetQ4_3: Q4.3 R17.1 | length 1.4
  Bottom Layer w0.508: Q4.3 R17.1
NetQ5_3: Q5.3 R18.1 | length 1.4
  Bottom Layer w0.508: Q5.3 R18.1
NetQ6_3: Q6.3 R19.1 | length 1.5
  Top Layer w0.508: R19.1 Q6.3
NetQ7_3: Q7.3 R20.1 | length 1.5
  Top Layer w0.508: R20.1 Q7.3
NetQ8_3: Q8.3 R21.1 | length 1.5
  Top Layer w0.508: R21.1 Q8.3
NetQ9_3: Q9.3 R22.1 | length 1.4
  Bottom Layer w0.508: Q9.3 R22.1
NetR6_2: R6.2 U2.17 | length 2.6
  Top Layer w0.508: R6.2 51.426,38.218 U2.17
NetR7_2: R7.2 U2.18 | length 2.3
  Top Layer w0.508: U2.18 52.696,37.601 R7.2
OSC32IN: C13.1 U3.3 X2.1 | length 16.1
  Bottom Layer w0.254: U3.3 54.582,20.78 55.981,19.38 59.341,19.38 60.73,17.991 62.684,17.991 X2.1 64.063,16.612 C13.1
OSC32OUT: C14.1 U3.4 X2.2 | length 14.1
  Bottom Layer w0.254: U3.4 54.082,20.633 55.792,18.923 59.152,18.923 X2.2 61.438,13.901 C14.1
OSCIN: C11.1 R10.2 U3.5 X1.1 | length 13.6
  Bottom Layer w0.254: U3.5 53.582,20.463 56.837,17.208 X1.1 56.837,13.022 R10.2 56.769,10.738 C11.1
OSCOUT: C12.1 R10.1 U3.6 X1.2 | length 13.1
  Bottom Layer w0.254: U3.6 53.082,16.701 X1.2 52.637,14.8 R10.1 54.483,10.734 C12.1
PC13: U3.2
PIR_DI: P4.2 U3.22 | length 49.7
  Top Layer w0.508: P4.2 v1(18.669,48.514) ; v1(38.481,29.718) v1(38.481,39.243)
  Bottom Layer w0.254: v1(38.481,29.718) 39.271,28.928 U3.22
  Bottom Layer w0.508: v1(18.669,48.514) 29.21,48.514 v1(38.481,39.243)
RAIN_AI: J1.5 U3.17 | length 31.5
  Bottom Layer w0.254: J1.5 23.241,17.526 25.654,17.526 34.556,26.428 U3.17
RAIN_DI: J1.6 U3.21 | length 33.9
  Bottom Layer w0.254: J1.6 19.812,23.495 19.812,24.809 20.53,25.527 25.273,25.527 28.174,28.428 U3.21
RESET: C15.2 R13.1 S3.2 U3.7 | length 13.5
  Bottom Layer w0.254: S3.2 C15.2 49.347,17.251 R13.1 49.403,18.923 49.784,19.304 51.562,19.304 52.582,20.324 U3.7
SVN: U2.5
SVP: U2.4
SWDCLK: C9.2 U3.37 | length 37.9
  Top Layer w0.254: v1(72.009,54.61) v1(72.009,57.404)
  Bottom Layer w0.254: U3.37 58.503,29.928 59.563,30.988 59.563,34.04 72.009,46.486 v1(72.009,54.61) ; v1(72.009,57.404) C9.2
SWDIO: C9.3 U3.34 | length 46.4
  Top Layer w0.254: v1(65.151,54.483) v1(65.151,57.404)
  Bottom Layer w0.254: U3.34 54.511,31.545 54.511,32.051 53.848,32.714 53.848,36.449 54.61,37.211 60.641,37.211 65.151,41.721 v1(65.151,54.483) ; v1(65.151,57.404) 65.151,62.738 65.659,63.246 68.834,63.246 69.469,62.611 C9.3
U0RX: C1.3 U2.34 | length 12
  Top Layer w0.508: U2.34 71.628,52.324 72.009,51.943 74.803,51.943 C1.3
U0TX: C1.2 U2.35 | length 11.8
  Top Layer w0.508: U2.35 71.644,53.594 71.882,53.832 C1.2
UART1_RX: R7.1 U3.31 | length 4
  Top Layer w0.254: v1(52.705,33.655) R7.1
  Bottom Layer w0.254: v1(52.705,33.655) 53.082,33.278 U3.31
UART1_TX: R6.1 U3.30 | length 5.5
  Top Layer w0.254: v1(50.546,33.401) 50.546,35.052 R6.1
  Bottom Layer w0.254: v1(50.546,33.401) 50.927,33.02 52.197,33.02 52.511,32.706 52.511,31.545 U3.30
VBAT: U3.1
pads on no net: U2.6 U2.7 U2.8 U2.9 U2.10 U2.11 U2.12 U2.13 U2.14 U2.16 U2.19 U2.20 U2.21 U2.22 U2.23 U2.24 U2.26 U2.27 U2.28 U2.29 U2.30 U2.31 U2.32 U2.33 U2.36 U2.37 U3.10 U3.25 U3.26 U3.27 U3.28 U3.32 U3.33 U3.38

## Keep-outs
Keep-Out Layer:
  the board outline again, w0.5

## Text inside footprints (layer, text, board x,y; h text height)
P3: Top Overlay "1" at 17.018,6.985 h1.27 r90; Top Overlay "2" at 14.478,6.477 h1.27 r90; Top Overlay "5" at 17.018,15.621 h1.27 r90; Top Overlay "6" at 14.478,15.621 h1.27 r90
U2: Mechanical 13 "ANTENNA" at 48.601,61.144 h1.78